# Altium PCB Lab1_Kondrashova_USB_RS485.PcbDoc
Units mm, origin at the board's own origin, x right, y up, seen from the top; angles counter-clockwise.
Board outline 39.5 x 22 mm, 4 copper layers (Top Layer, Signal Layer 1, Signal Layer 2, Bottom Layer), stack 1.522 mm thick; 23 components, 22 nets, 103 pads, 122 vias.
Unrouted connection lines stored in the file: 1.
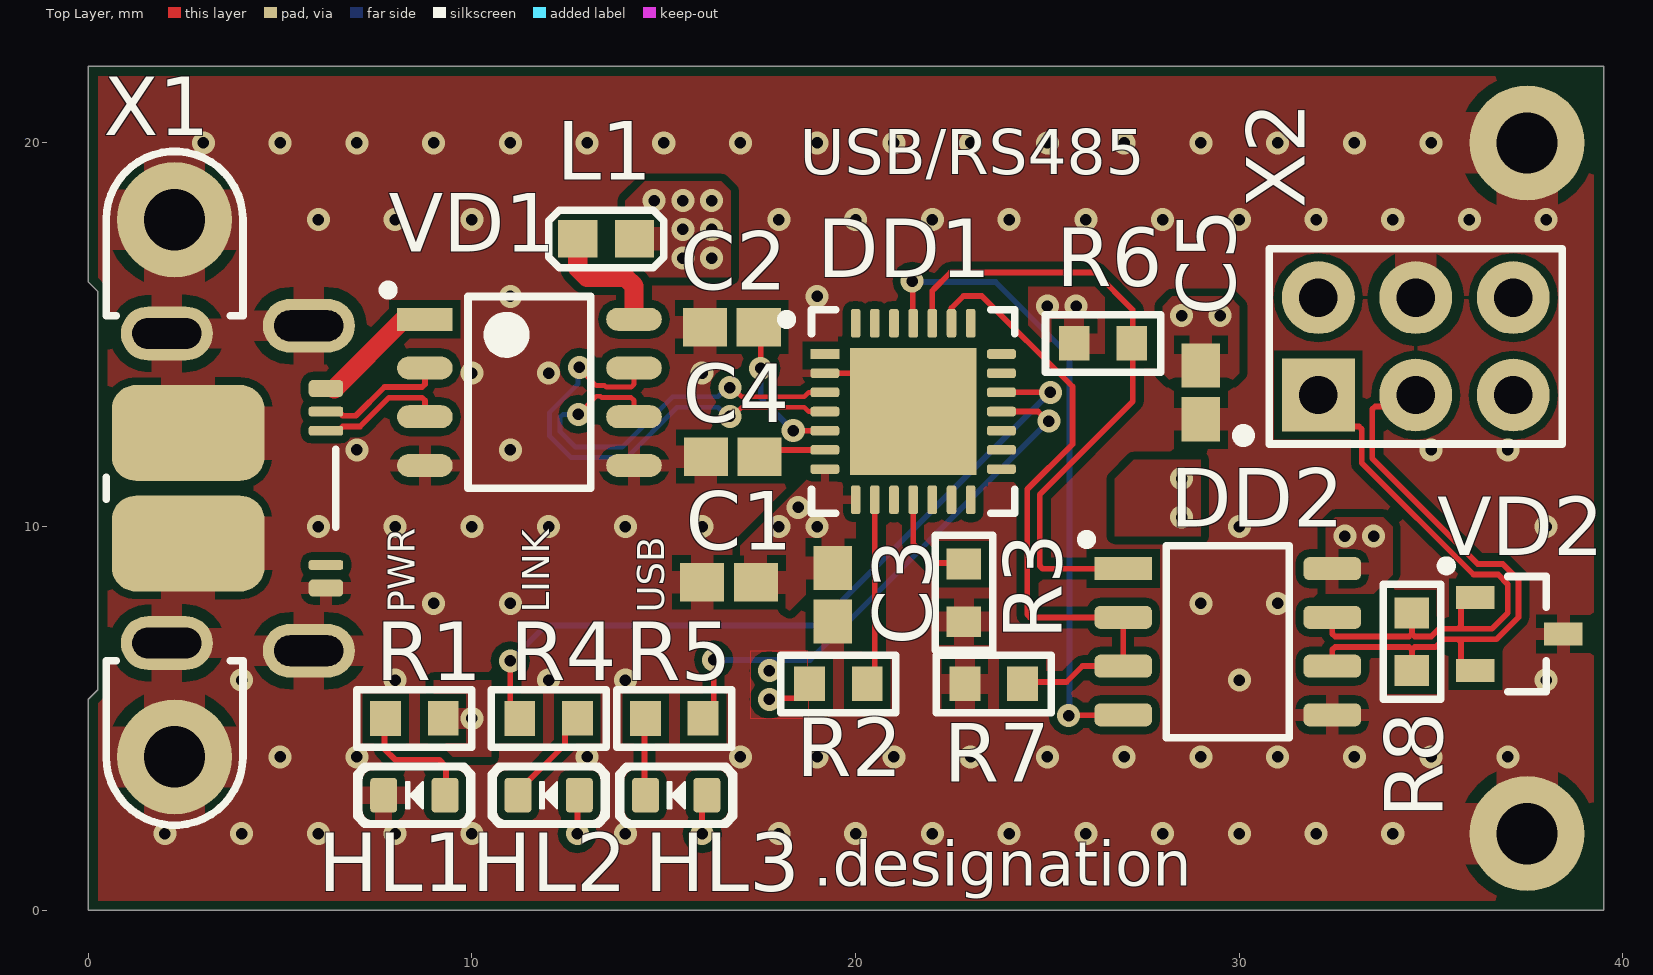
[diagram p0: Top Layer view]
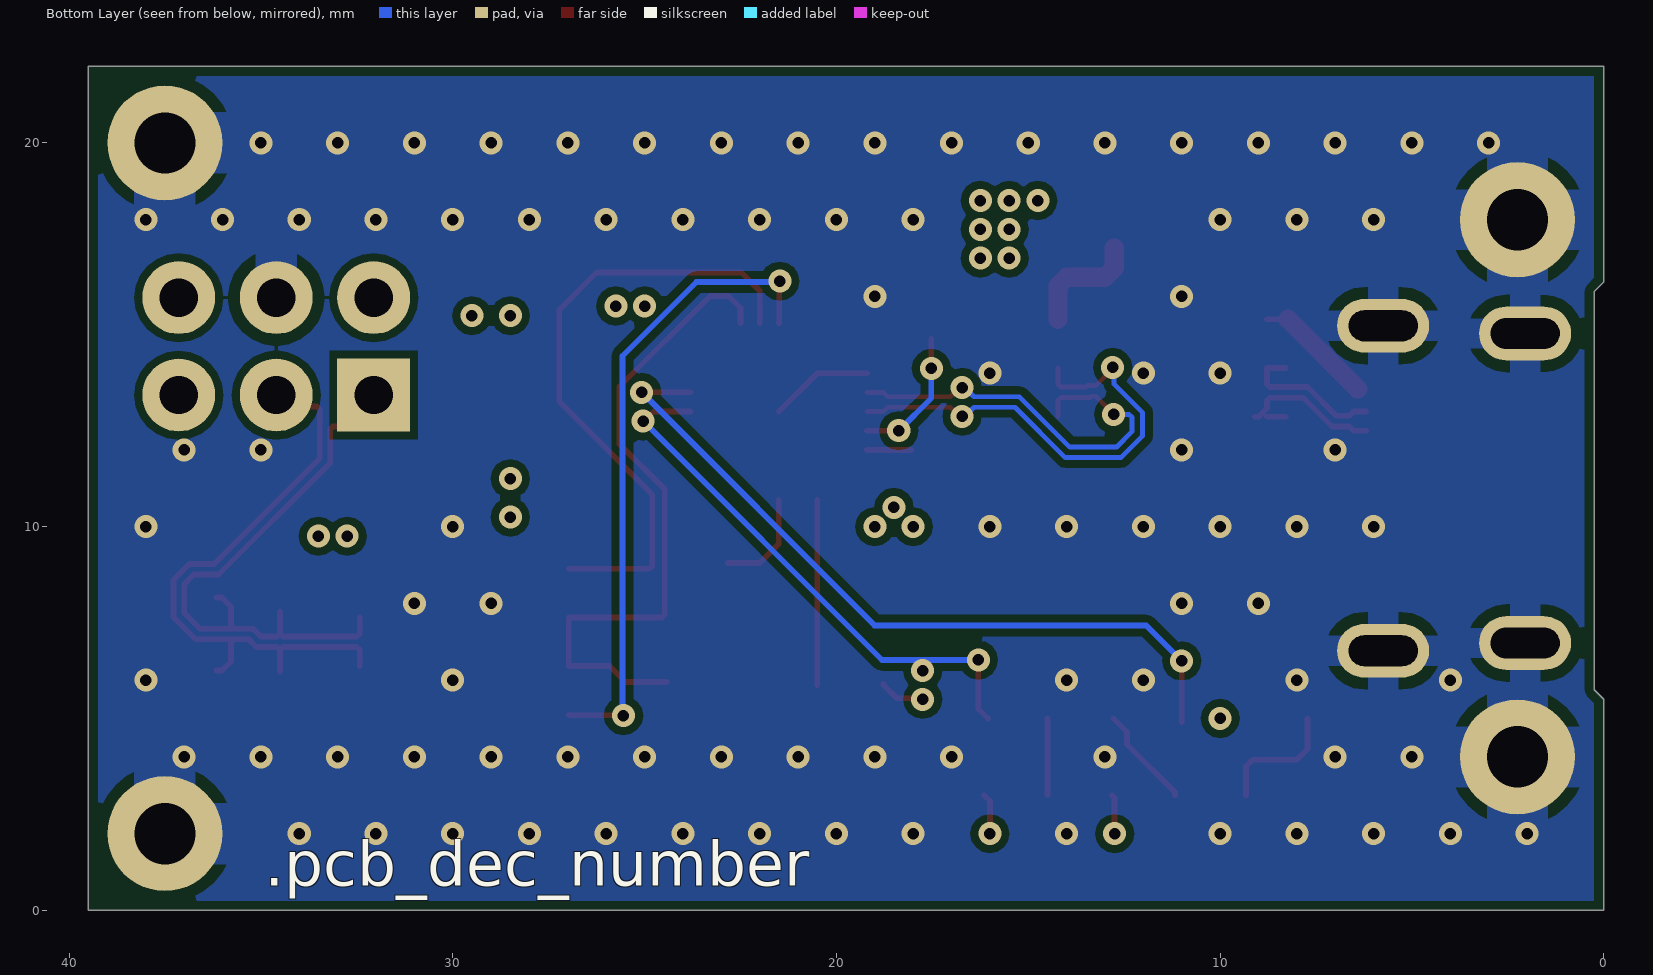
[diagram p1: Bottom Layer view, seen from below]
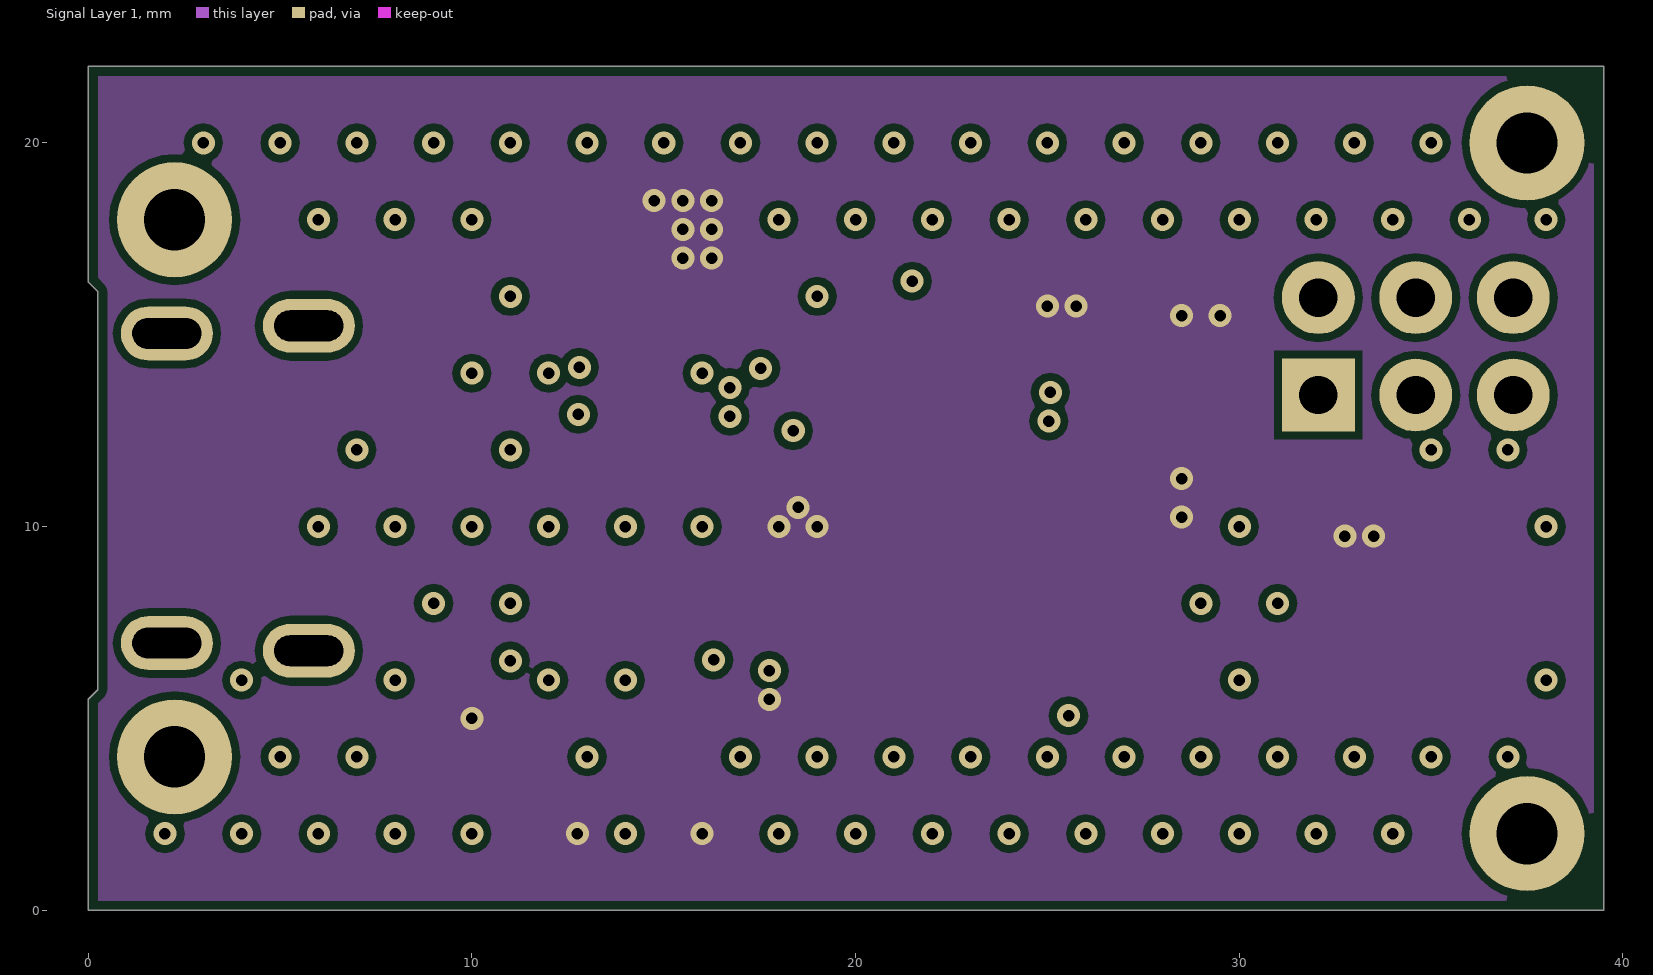
[diagram p2: Signal Layer 1]
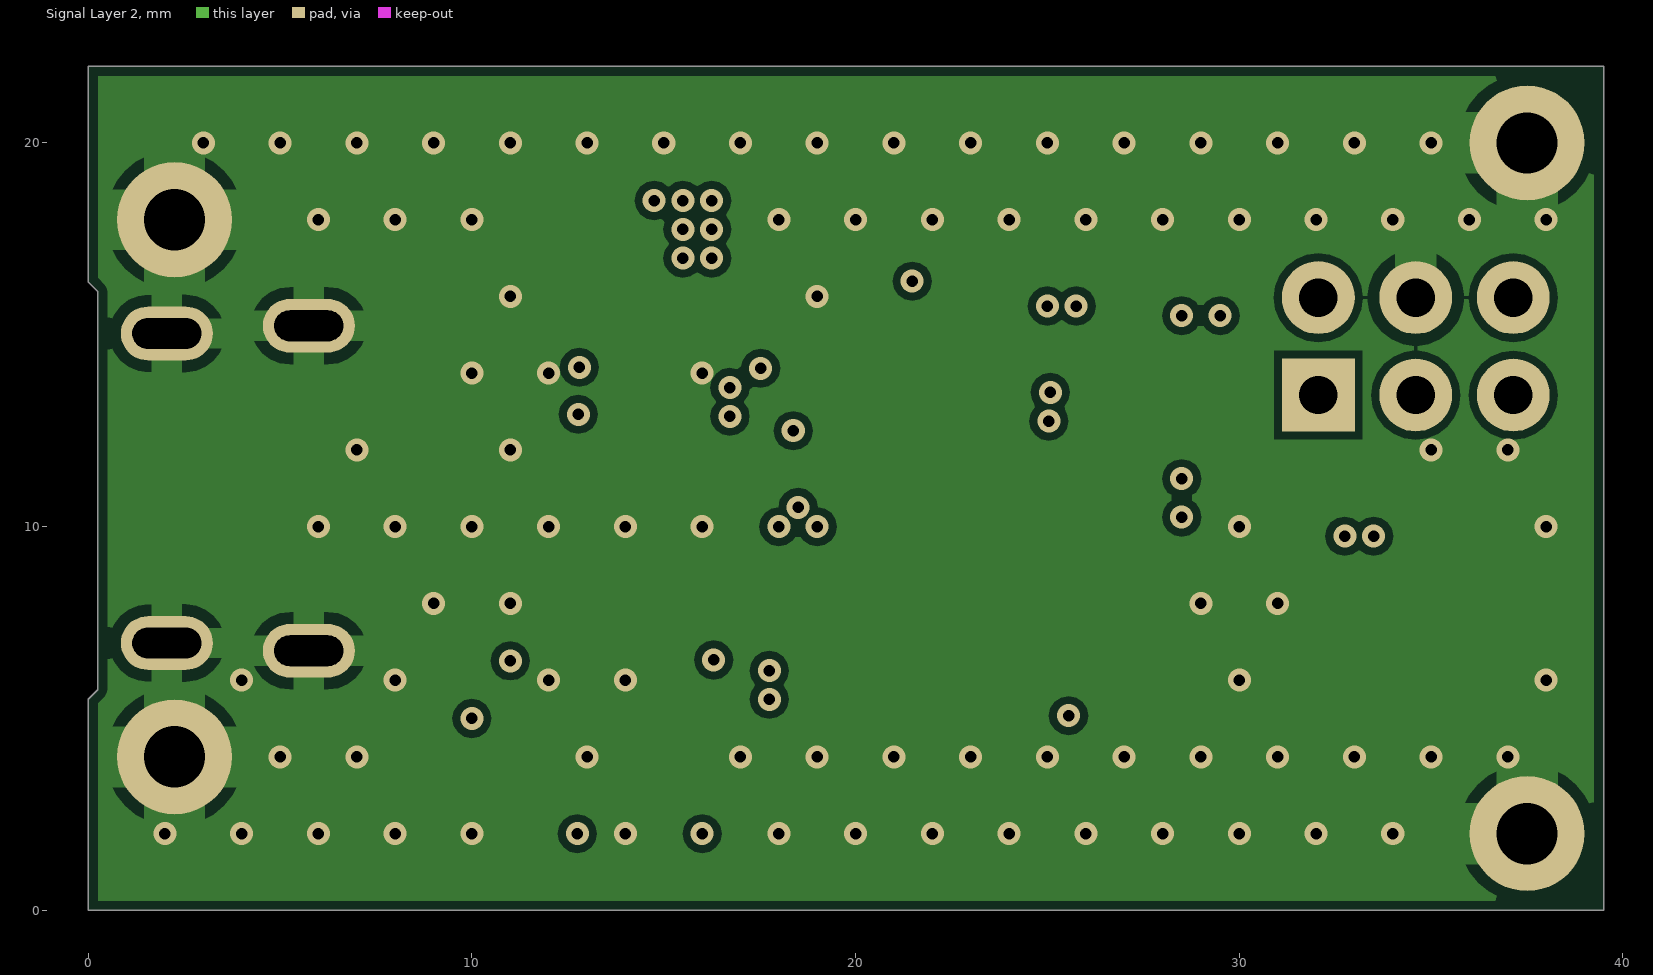
[diagram p3: Signal Layer 2]

## Layer stack, top to bottom
Top Solder: solder mask 0.0102, Solder Resist, Dk 3.5
Top Layer: signal copper 0.018
Prepreg 1: prepreg 0.125, FR4 HiTg170, Dk 5.07
Signal Layer 1: signal copper 0.018
Core 1: core 1.2, FR4, Dk 4.6
Signal Layer 2: signal copper 0.018
Prepreg 2: prepreg 0.125, FR4 HiTg170, Dk 5.07
Bottom Layer: signal copper 0.018
Bottom Solder: solder mask 0.0102, Solder Resist, Dk 3.5

## Board outline
0,0 0,5.5 0.25,5.75 0.25,16.125 0,16.375 0,22 39.5,22 39.5,0

## Design rules (kind name [scope] priority, off if disabled: settings)
AcuteAngle min_acute_angle [OnCopper] p1: minimum=3.50000000000000E+0001 checktracksonly=FALSE // Минимальный угол между примитивами топологии
BoardOutlineClearance board_outline_clearance_std [NOT (OnLayer('Bottom Overlay') OR OnLayer('Top Overlay'))] p1: gap=0.25 ignorepadtopadclearanceinfootprint=FALSE except(0: Arc-SplitContinuation Track-SplitContinuation SMDPad-SplitContinuation THPad-SplitContinuation Via-SplitContinuation Fill-SplitContinuation Poly-SplitContinuation Region-SplitContinuation Text-SplitContinuation) // Отступ элементов топологии от края фрезеруемой печатной платы
Clearance clearance_outer_18um_std [OnTopLayer OR OnBottomLayer] p1: gap=0.125 ignorepadtopadclearanceinfootprint=TRUE except(0.2: Arc-Fill Arc-Poly Track-Fill Track-Poly SMDPad-SMDPad SMDPad-Fill SMDPad-Poly THPad-Fill THPad-Poly Via-Fill Via-Poly Fill-Fill Fill-Poly Poly-Poly Poly-Region Poly-Text; 0.25: Arc-Hole Track-Hole SMDPad-Hole THPad-Hole Via-Hole Fill-Hole Poly-Hole Region-Hole Text-Hole) // Зазоры на внешних слоях
Clearance clearance_inner_18um_std [NOT (OnTopLayer Or OnBottomLayer)] p2: gap=0.125 ignorepadtopadclearanceinfootprint=FALSE except(0.2: Arc-Fill Arc-Poly Track-Fill Track-Poly SMDPad-SMDPad SMDPad-Fill SMDPad-Poly THPad-Fill THPad-Poly Via-Fill Via-Poly Fill-Fill Fill-Poly Poly-Poly Poly-Region Poly-Text; 0.25: Arc-Hole Track-Hole SMDPad-Hole THPad-Hole Via-Hole Fill-Hole Poly-Hole Region-Hole Text-Hole) // Зазоры на внутренних слоях
ComponentClearance [All] p1: gap=0 collisioncheckmode=3 verticalgap=0 showdistances=FALSE
DiffPairsRouting "Schematic Differential Pairs Routing_9" [InNet('CN_D_P')] p1: maxlimit=0.15 minlimit=0.15 mostfreqgap=0.15 toplayer_minwidth=0.125 toplayer_maxwidth=0.125 toplayer_prefwidth=0.125 midlayer1_minwidth=0.381 midlayer1_maxwidth=0.381 midlayer1_prefwidth=0.381 midlayer2_minwidth=0.381 midlayer2_maxwidth=0.381 midlayer2_prefwidth=0.381 bottomlayer_minwidth=0.125 bottomlayer_maxwidth=0.125 bottomlayer_prefwidth=0.125 maxuncoupledlength=12.7
DiffPairsRouting "Schematic Differential Pairs Routing_8" [InNet('RS485_N')] p2: maxlimit=0.15 minlimit=0.15 mostfreqgap=0.15 toplayer_minwidth=0.125 toplayer_maxwidth=0.125 toplayer_prefwidth=0.125 midlayer1_minwidth=0.381 midlayer1_maxwidth=0.381 midlayer1_prefwidth=0.381 midlayer2_minwidth=0.381 midlayer2_maxwidth=0.381 midlayer2_prefwidth=0.381 bottomlayer_minwidth=0.125 bottomlayer_maxwidth=0.125 bottomlayer_prefwidth=0.125 maxuncoupledlength=12.7
DiffPairsRouting "Schematic Differential Pairs Routing_7" [InNet('USB_D_N')] p3: maxlimit=0.15 minlimit=0.15 mostfreqgap=0.15 toplayer_minwidth=0.125 toplayer_maxwidth=0.125 toplayer_prefwidth=0.125 midlayer1_minwidth=0.381 midlayer1_maxwidth=0.381 midlayer1_prefwidth=0.381 midlayer2_minwidth=0.381 midlayer2_maxwidth=0.381 midlayer2_prefwidth=0.381 bottomlayer_minwidth=0.125 bottomlayer_maxwidth=0.125 bottomlayer_prefwidth=0.125 maxuncoupledlength=12.7
DiffPairsRouting "Schematic Differential Pairs Routing_6" [InNet('USB_D_P')] p4: maxlimit=0.15 minlimit=0.15 mostfreqgap=0.15 toplayer_minwidth=0.125 toplayer_maxwidth=0.125 toplayer_prefwidth=0.125 midlayer1_minwidth=0.381 midlayer1_maxwidth=0.381 midlayer1_prefwidth=0.381 midlayer2_minwidth=0.381 midlayer2_maxwidth=0.381 midlayer2_prefwidth=0.381 bottomlayer_minwidth=0.125 bottomlayer_maxwidth=0.125 bottomlayer_prefwidth=0.125 maxuncoupledlength=12.7
DiffPairsRouting "Schematic Differential Pairs Routing_5" [InNet('CN_D_N')] p5: maxlimit=0.65 minlimit=0.254 mostfreqgap=0.65 toplayer_mingap=0.65 toplayer_minwidth=0.125 toplayer_maxwidth=0.125 toplayer_prefwidth=0.125 bottomlayer_mingap=0.65 bottomlayer_minwidth=0.125 bottomlayer_maxwidth=0.125 bottomlayer_prefwidth=0.125 impedanceprofiledriven=TRUE impedanceprofileid={A63519B1-61F6-4221-AEF2-28902BD0E68D} impedanceprofilevalue=120.000000 maxuncoupledlength=12.7
DiffPairsRouting "Schematic Differential Pairs Routing_4" [InNet('CN_D_P')] p6: maxlimit=0.65 minlimit=0.254 mostfreqgap=0.65 toplayer_mingap=0.65 toplayer_minwidth=0.125 toplayer_maxwidth=0.125 toplayer_prefwidth=0.125 bottomlayer_mingap=0.65 bottomlayer_minwidth=0.125 bottomlayer_maxwidth=0.125 bottomlayer_prefwidth=0.125 impedanceprofiledriven=TRUE impedanceprofileid={A63519B1-61F6-4221-AEF2-28902BD0E68D} impedanceprofilevalue=120.000000 maxuncoupledlength=12.7
DiffPairsRouting "Schematic Differential Pairs Routing_3" [InNet('RS485_N')] p7: maxlimit=0.65 minlimit=0.254 mostfreqgap=0.65 toplayer_mingap=0.65 toplayer_minwidth=0.125 toplayer_maxwidth=0.125 toplayer_prefwidth=0.125 bottomlayer_mingap=0.65 bottomlayer_minwidth=0.125 bottomlayer_maxwidth=0.125 bottomlayer_prefwidth=0.125 impedanceprofiledriven=TRUE impedanceprofileid={A63519B1-61F6-4221-AEF2-28902BD0E68D} impedanceprofilevalue=120.000000 maxuncoupledlength=12.7
DiffPairsRouting "Schematic Differential Pairs Routing_2" [InNet('RS485_P')] p8: maxlimit=0.65 minlimit=0.254 mostfreqgap=0.65 toplayer_mingap=0.65 toplayer_minwidth=0.125 toplayer_maxwidth=0.125 toplayer_prefwidth=0.125 bottomlayer_mingap=0.65 bottomlayer_minwidth=0.125 bottomlayer_maxwidth=0.125 bottomlayer_prefwidth=0.125 impedanceprofiledriven=TRUE impedanceprofileid={A63519B1-61F6-4221-AEF2-28902BD0E68D} impedanceprofilevalue=120.000000 maxuncoupledlength=12.7
DiffPairsRouting diff_pairs_routing [All] p9: maxlimit=0.254 minlimit=0.127 mostfreqgap=0.254 toplayer_maxgap=0.127 toplayer_prefgap=0.127 toplayer_minwidth=0.143 toplayer_maxwidth=0.143 toplayer_prefwidth=0.143 midlayer1_minwidth=0.381 midlayer1_maxwidth=0.381 midlayer1_prefwidth=0.381 midlayer2_minwidth=0.381 midlayer2_maxwidth=0.381 midlayer2_prefwidth=0.381 bottomlayer_maxgap=0.127 bottomlayer_prefgap=0.127 bottomlayer_minwidth=0.143 bottomlayer_maxwidth=0.143 bottomlayer_prefwidth=0.143 impedanceprofiledriven=TRUE impedanceprofileid={FD46899E-B5A2-4EF5-A302-5D2DB6A51F35} maxuncoupledlength=12.7 // Правила трассировки дифференциальных пар
HoleSize min_hole_size_std [IsPad] p1: absolutevalues=TRUE maxlimit=5.9 minlimit=0.6 maxpercent=80.000 minpercent=20.000 // Диаметр межслойного переходного отверстия
HoleSize min_hole_size_via_std [IsVia] p2: absolutevalues=TRUE maxlimit=5.9 minlimit=0.3 maxpercent=80.000 minpercent=20.000 // Минимальный диаметр монтажного отверстия
HoleToHoleClearance hole_to_hole_clearance_std [All] p1: gap=0.2 allowstackedmicrovias=FALSE // Минимальное расстояние между краями двух отверстий
MinimumAnnularRing min_via_ar_std [All] p1: minimumring=0.15 // Поясок площадки переходного отверстия (Annular ring VIA)
MinimumAnnularRing min_pad_ar_std [All] p2: minimumring=0.2 // Поясок монтажной контактной площадки (Annular ring PAD)
MinimumSolderMaskSliver min_solder_mask_bridge_std [All] p1: minsoldermaskwidth=0.15 // Мнимальная ширина масочного мостика
PlaneClearance plane_clearance_18um_std [All] p1: clearance=0.2 // Отступ полигона (для слоя plane) от элементов топологии
PlaneConnect [All] p1: planeconnectstyle=Relief reliefexpansion=0.5 reliefentries=4 reliefconductorwidth=0.2 reliefairgap=0.2
PolygonConnect poly_connect_to_pad<=0.3 [(AsMM(PadXSize_AllLayers)<=0.301) or (AsMM(PadYSize_AllLayers)<=0.301)] p1: thpad.connectstyle=Relief thpad.reliefconductorwidth=0.2 thpad.reliefentries=4 thpad.polygonreliefangle="90 Angle" thpad.airgapwidth=0.2 smdpad.connectstyle=Relief smdpad.reliefconductorwidth=0.2 smdpad.reliefentries=4 smdpad.polygonreliefangle="90 Angle" smdpad.airgapwidth=0.2 via.connectstyle=Direct via.reliefconductorwidth=0.254 via.reliefentries=4 via.polygonreliefangle="90 Angle" via.airgapwidth=0.254 // Правила подключения полигонов для падов от 0,3мм и меньше
PolygonConnect poly_connect_to_pad<=0.4 [(AsMM(PadXSize_AllLayers)<=0.401) or (AsMM(PadYSize_AllLayers)<=0.401)] p2: thpad.connectstyle=Relief thpad.reliefconductorwidth=0.26 thpad.reliefentries=4 thpad.polygonreliefangle="90 Angle" thpad.airgapwidth=0.2 smdpad.connectstyle=Relief smdpad.reliefconductorwidth=0.26 smdpad.reliefentries=4 smdpad.polygonreliefangle="90 Angle" smdpad.airgapwidth=0.2 via.connectstyle=Direct via.reliefconductorwidth=0.254 via.reliefentries=4 via.polygonreliefangle="90 Angle" via.airgapwidth=0.254 // Правила подключения полигонов для падов от 0,4 и меньше
PolygonConnect poly_connect_to_pad<=0.6 [(AsMM(PadXSize_AllLayers)<=0.601) or (AsMM(PadYSize_AllLayers)<=0.601)] p3: thpad.connectstyle=Relief thpad.reliefconductorwidth=0.33 thpad.reliefentries=4 thpad.polygonreliefangle="90 Angle" thpad.airgapwidth=0.2 smdpad.connectstyle=Relief smdpad.reliefconductorwidth=0.33 smdpad.reliefentries=4 smdpad.polygonreliefangle="90 Angle" smdpad.airgapwidth=0.2 via.connectstyle=Direct via.reliefconductorwidth=0.254 via.reliefentries=4 via.polygonreliefangle="90 Angle" via.airgapwidth=0.254 // Правила подключения полигонов для падов от 0,6мм и меньше
PolygonConnect poly_connect_to_pad<=0.7 [(AsMM(PadXSize_AllLayers)<=0.701) or (AsMM(PadYSize_AllLayers)<=0.701)] p4: thpad.connectstyle=Relief thpad.reliefconductorwidth=0.46 thpad.reliefentries=4 thpad.polygonreliefangle="90 Angle" thpad.airgapwidth=0.2 smdpad.connectstyle=Relief smdpad.reliefconductorwidth=0.46 smdpad.reliefentries=4 smdpad.polygonreliefangle="90 Angle" smdpad.airgapwidth=0.2 via.connectstyle=Direct via.reliefconductorwidth=0.254 via.reliefentries=4 via.polygonreliefangle="90 Angle" via.airgapwidth=0.254 // Правила подключения полигонов для падов от 0,7мм и меньше
PolygonConnect poly_connect_to_pad<=0.8 [(AsMM(PadXSize_AllLayers)<=0.8)or(AsMM(PadYSize_AllLayers)<=0.8)] p5: thpad.connectstyle=Relief thpad.reliefconductorwidth=0.53 thpad.reliefentries=4 thpad.polygonreliefangle="90 Angle" thpad.airgapwidth=0.3 smdpad.connectstyle=Relief smdpad.reliefconductorwidth=0.53 smdpad.reliefentries=4 smdpad.polygonreliefangle="90 Angle" smdpad.airgapwidth=0.2 via.connectstyle=Direct via.reliefconductorwidth=0.254 via.reliefentries=4 via.polygonreliefangle="90 Angle" via.airgapwidth=0.254 // Правила подключения полигонов для падов от 0,8мм и меньше
PolygonConnect poly_connect_to_pad<=1 [(AsMM(PadXSize_AllLayers)<=1.01)or(AsMM(PadYSize_AllLayers)<=1.01)] p6: thpad.connectstyle=Relief thpad.reliefconductorwidth=0.6 thpad.reliefentries=4 thpad.polygonreliefangle="90 Angle" thpad.airgapwidth=0.3 smdpad.connectstyle=Relief smdpad.reliefconductorwidth=0.6 smdpad.reliefentries=4 smdpad.polygonreliefangle="90 Angle" smdpad.airgapwidth=0.2 via.connectstyle=Direct via.reliefconductorwidth=0.254 via.reliefentries=4 via.polygonreliefangle="90 Angle" via.airgapwidth=0.254 // Правила подключения полигонов для падов от 1мм и меньше
PolygonConnect poly_connect_to_pad<=1.3 [(AsMM(PadXSize_AllLayers)<=1.31)or(AsMM(PadYSize_AllLayers)<=1.31)] p7: thpad.connectstyle=Relief thpad.reliefconductorwidth=0.66 thpad.reliefentries=4 thpad.polygonreliefangle="90 Angle" thpad.airgapwidth=0.3 smdpad.connectstyle=Relief smdpad.reliefconductorwidth=0.86 smdpad.reliefentries=4 smdpad.polygonreliefangle="90 Angle" smdpad.airgapwidth=0.2 via.connectstyle=Direct via.reliefconductorwidth=0.254 via.reliefentries=4 via.polygonreliefangle="90 Angle" via.airgapwidth=0.254 // Правила подключения полигонов для падов от 1,3мм и меньше
PolygonConnect poly_connect_to_pad<=1.6 [(AsMM(PadXSize_AllLayers)<=1.61)or(AsMM(PadYSize_AllLayers)<=1.61)] p8: thpad.connectstyle=Relief thpad.reliefconductorwidth=0.8 thpad.reliefentries=4 thpad.polygonreliefangle="90 Angle" thpad.airgapwidth=0.3 smdpad.connectstyle=Relief smdpad.reliefconductorwidth=1 smdpad.reliefentries=4 smdpad.polygonreliefangle="90 Angle" smdpad.airgapwidth=0.2 via.connectstyle=Direct via.reliefconductorwidth=0.254 via.reliefentries=4 via.polygonreliefangle="90 Angle" via.airgapwidth=0.254 // Правила подключения полигонов для падов от 1,6мм и меньше
PolygonConnect poly_connect_to_pad<=1.8 [(AsMM(PadXSize_AllLayers)<=1.8)or(AsMM(PadYSize_AllLayers)<=1.8)] p9: thpad.connectstyle=Relief thpad.reliefconductorwidth=1 thpad.reliefentries=4 thpad.polygonreliefangle="90 Angle" thpad.airgapwidth=0.3 smdpad.connectstyle=Relief smdpad.reliefconductorwidth=1.2 smdpad.reliefentries=4 smdpad.polygonreliefangle="90 Angle" smdpad.airgapwidth=0.2 via.connectstyle=Direct via.reliefconductorwidth=0.254 via.reliefentries=4 via.polygonreliefangle="90 Angle" via.airgapwidth=0.254 // Правила подключения полигонов для падов от 1,8мм и меньше
PolygonConnect poly_connect_to_pad<=2 [(AsMM(PadXSize_AllLayers)<=2.01)or(AsMM(PadYSize_AllLayers)<=2.01)] p10: thpad.connectstyle=Relief thpad.reliefconductorwidth=1.1 thpad.reliefentries=4 thpad.polygonreliefangle="90 Angle" thpad.airgapwidth=0.3 smdpad.connectstyle=Relief smdpad.reliefconductorwidth=1.4 smdpad.reliefentries=4 smdpad.polygonreliefangle="90 Angle" smdpad.airgapwidth=0.2 via.connectstyle=Direct via.reliefconductorwidth=0.254 via.reliefentries=4 via.polygonreliefangle="90 Angle" via.airgapwidth=0.254 // Правила подключения полигонов для падов от 2мм и меньше
PolygonConnect poly_connect_to_pad<=2.3 [(AsMM(PadXSize_AllLayers)<=2.31)or(AsMM(PadYSize_AllLayers)<=2.31)] p11: thpad.connectstyle=Relief thpad.reliefconductorwidth=1.2 thpad.reliefentries=4 thpad.polygonreliefangle="90 Angle" thpad.airgapwidth=0.3 smdpad.connectstyle=Relief smdpad.reliefconductorwidth=1.4 smdpad.reliefentries=4 smdpad.polygonreliefangle="90 Angle" smdpad.airgapwidth=0.2 via.connectstyle=Direct via.reliefconductorwidth=0.254 via.reliefentries=4 via.polygonreliefangle="90 Angle" via.airgapwidth=0.254 // Правила подключения полигонов для падов от 2,3мм и меньше
PolygonConnect poly_connect_to_pad<=2.5 [(AsMM(PadXSize_AllLayers)<=2.51)or(AsMM(PadYSize_AllLayers)<=2.51)] p12: thpad.connectstyle=Relief thpad.reliefconductorwidth=1.2 thpad.reliefentries=4 thpad.polygonreliefangle="90 Angle" thpad.airgapwidth=0.3 smdpad.connectstyle=Relief smdpad.reliefconductorwidth=1.4 smdpad.reliefentries=4 smdpad.polygonreliefangle="90 Angle" smdpad.airgapwidth=0.2 via.connectstyle=Direct via.reliefconductorwidth=0.254 via.reliefentries=4 via.polygonreliefangle="90 Angle" via.airgapwidth=0.254 // Правила подключения полигонов для падов от 2,5мм и меньше
PolygonConnect poly_connect_to_pad<=2.7 [(AsMM(PadXSize_AllLayers)<=2.71)or(AsMM(PadYSize_AllLayers)<=2.71)] p13: thpad.connectstyle=Relief thpad.reliefconductorwidth=1.4 thpad.reliefentries=4 thpad.polygonreliefangle="90 Angle" thpad.airgapwidth=0.3 smdpad.connectstyle=Relief smdpad.reliefconductorwidth=1.6 smdpad.reliefentries=4 smdpad.polygonreliefangle="90 Angle" smdpad.airgapwidth=0.2 via.connectstyle=Direct via.reliefconductorwidth=0.254 via.reliefentries=4 via.polygonreliefangle="90 Angle" via.airgapwidth=0.254 // Правила подключения полигонов для падов от 2,7мм и меньше
PolygonConnect poly_connect_to_pad<=3 [(AsMM(PadXSize_AllLayers)<=3.01)or(AsMM(PadYSize_AllLayers)<=3.01)] p14: thpad.connectstyle=Relief thpad.reliefconductorwidth=1.6 thpad.reliefentries=4 thpad.polygonreliefangle="90 Angle" thpad.airgapwidth=0.3 smdpad.connectstyle=Relief smdpad.reliefconductorwidth=1.8 smdpad.reliefentries=4 smdpad.polygonreliefangle="90 Angle" smdpad.airgapwidth=0.2 via.connectstyle=Direct via.reliefconductorwidth=0.254 via.reliefentries=4 via.polygonreliefangle="90 Angle" via.airgapwidth=0.254 // Правила подключения полигонов для падов от 3мм и меньше
PolygonConnect poly_connect_to_pad<=7 [(AsMM(PadXSize_AllLayers)<7.01)or(AsMM(PadYSize_AllLayers)<=7.01)] p15: thpad.connectstyle=Relief thpad.reliefconductorwidth=2 thpad.reliefentries=4 thpad.polygonreliefangle="90 Angle" thpad.airgapwidth=0.4 smdpad.connectstyle=Relief smdpad.reliefconductorwidth=2 smdpad.reliefentries=4 smdpad.polygonreliefangle="90 Angle" smdpad.airgapwidth=0.3 via.connectstyle=Direct via.reliefconductorwidth=0.254 via.reliefentries=4 via.polygonreliefangle="90 Angle" via.airgapwidth=0.254 // Правила подключения полигонов для падов от 7мм и меньше
PolygonConnect poly_connect_to_pad [All] p16: thpad.connectstyle=Relief thpad.reliefconductorwidth=0.25 thpad.reliefentries=4 thpad.polygonreliefangle="90 Angle" thpad.airgapwidth=0.2 smdpad.connectstyle=Relief smdpad.reliefconductorwidth=0.25 smdpad.reliefentries=4 smdpad.polygonreliefangle="90 Angle" smdpad.airgapwidth=0.2 via.connectstyle=Direct via.reliefconductorwidth=0.25 via.reliefentries=4 via.polygonreliefangle="90 Angle" via.airgapwidth=0.2 // Правила подключения полигонов общие
RoutingCorners [All] p1 off: cornerstyle=45-Degree minsetback=2.5 maxsetback=2.5
RoutingVias [All] p1: holewidth=0.3 width=0.6 viastyle="Through Hole" minholewidth=0.3 minwidth=0.6 maxholewidth=5.9 maxwidth=6.4
SilkToSilkClearance silk_to_silk_clearance_std [All] p1 off: silktosilkclearance=0.15 // Отступ текста шелкографии от других примитивов шелкографии
SilkToSolderMaskClearance silk_to_solder_mask_clearance_std [IsPad] p1 off: minsilkscreentomaskgap=0.15 clearancetoexposedcopper=FALSE // Минимальное расстояние между элементами шелкографии и вскрытой медью
SolderMaskExpansion solder_mask_expansion_std [All] p1: expansion=0.05 // Припуск паяльной масски
UnRoutedNet [All] p1: checkbadconnections=TRUE
Width width_18um_std [All] p1: maxlimit=10 minlimit=0.125 preferedwidth=0.15 checkconnectedcopper=TRUE // Ширина проводников (общая)
19 further rules are at their usual default settings.

## Classes and differential pairs
differential pair class USB_SIGNALS: CN_D RS485 USB_D
differential pair USB_D: +USB_D_P -USB_D_N
differential pair RS485: +RS485_P -RS485_N
differential pair CN_D: +CN_D_P -CN_D_N

## Components (designator, comment, footprint, x,y, rotation, side; value= is the part's Value field where it differs from the comment)
C1 "1 мк" C0603 16.7,8.55 r180 top
C2 "1 мк" C0603 16.775,15.2 r180 top
C3 "0,1 мк" C0603 19.4,8.225 r270 top
C4 "0,1 мк" C0603 16.8,11.825 r180 top
C5 "0,1 мк" C0603 29,13.5 r90 top
DD1 "CP2103-GM" QFN-28-500X500X90 21.5,13 r0 top
DD2 "SN65HVD1782D" SOIC-8 29.7,7 r0 top
HL1 "TLMY1000-GS08" HL0603 8.5,3 r0 top
HL2 "TLMS1000-GS08" HL0603 12,3 r0 top
HL3 "TLMG1100-GS08" HL0603 15.325,3 r0 top
L1 "BLM18PG221SN1D" BLM-2-0603 13.5,17.5 r0 top
R1 "220" R0603 8.5,5 r0 top
R2 "4,7 к" R0603 19.55,5.9 r180 top
R3 "10 к" R0603 22.825,8.275 r90 top
R4 "330" R0603 12,5 r0 top
R5 "330" R0603 15.275,5 r0 top
R6 "10 к" R0603 26.45,14.775 r180 top (schematic designator R7)
R7 "10 к" R0603 23.6,5.9 r0 top (schematic designator R6)
R8 "120" R0603 34.5,7 r90 top
VD1 "USB6B1" SO-8 11.5,13.5 r0 top
VD2 "SM712-02HTG" SOT23-3 37.3,7.2 r0 top
X1 "2108877-1" 2108877-1 2.5,11 r90 top
X2 "DS1021-2x3SF11-B" DS1021-2X3SF11-B 34.6,14.7 r0 top

## Footprints (in the part's own frame and the unit in brackets; to place one, negate y for a bottom-side part, rotate by r counter-clockwise, add the part's x,y. Pads: shape width x height; smd on the part's side, far side on the other; paste and mask are expansions set on the pad)
2108877-1 [mm]
  rrect50% 0.45x0.9 smd: 1(2.6,-3.696) 5(-2.6,-3.696)
  rrect50% 0.25x0.9 smd: 2(2,-3.696) 3(1.5,-3.696) 4(-2,-3.696)
  round 3 hole 1.6: TP1(-7,0.25) TP1(7,0.25)
  oval 1.4x2.4 hole 0.8 slot 1.8 at 90 deg mask+0.102: TP1(-4.235,-3.25) TP1(-4.035,0.45) TP1(4.035,0.45) TP1(4.235,-3.25)
  rrect50% 2.5x3.98 smd: TP1(-1.441,-0.104) TP1(1.441,-0.104)
  silkscreen extent -8.78,-3.95 8.78,2.03, body extent -8.9,-3.95 8.9,3.95, height 3.39
BLM-2-0603 [mm] "Chip Inductor, 2-Leads, Body 1,60x0,80mm, IPC Medium Density"
  rect 1.02x0.98 smd: 1(-0.74,0) 2(0.74,0)
  silkscreen extent -1.5,-0.75 1.5,0.75, body extent -0.8,-0.37 0.8,0.38, height 0.8
C0603 [mm] "Chip Capacitor, 2-Leads, Body 1,60x0,80mm, IPC Medium Density"
  rect 1.15x1 smd: 1(-0.7,0) 2(0.7,0)
  body extent -0.8,-0.4 0.8,0.4, height 0.8
DS1021-2X3SF11-B [mm]
  rect 1.9x1.9 hole 1: 1(-2.54,-1.27)
  round 1.9 hole 1: 2(0,-1.27) 4(-2.54,1.27)
  round 1.9 hole 1 mask+0.102: 3(2.54,-1.27) 5(0,1.27) 6(2.54,1.27)
  silkscreen extent -4.5,-2.55 3.81,2.54, body extent -3.81,-2.54 3.81,2.54, height 8.59
HL0603 [mm] "Chip Resistor, 2-Leads, Body 1,60x0,80mm, IPC Medium Density"
  rrect25% 0.7x0.9 smd: 1(-0.8,0) 2(0.8,0)
  silkscreen extent -1.5,-0.75 1.5,0.75, body extent -0.81,-0.4 0.81,0.4, height 0.64
QFN-28-500X500X90 [mm] "QFN, 28-Leads, Body 5,00x5,00mm, Pitch 0,50mm, Thermal Pad 3,20x3,20mm, IPC Medium Density"
  rect 3.3x3.3 smd: 0(0,0)
  rect 0.75x0.25 smd: 1(-2.3,1.5)
  rrect50% 0.75x0.25 smd: 2(-2.3,1) 3(-2.3,0.5) 4(-2.3,0) 5(-2.3,-0.5) 6(-2.3,-1) 7(-2.3,-1.5) 15(2.3,-1.5) 16(2.3,-1) 17(2.3,-0.5) 18(2.3,0) 19(2.3,0.5) 20(2.3,1) 21(2.3,1.5)
  rrect50% 0.25x0.75 smd: 8(-1.5,-2.3) 9(-1,-2.3) 10(-0.5,-2.3) 11(0,-2.3) 12(0.5,-2.3) 13(1,-2.3) 14(1.5,-2.3) 22(1.5,2.3) 23(1,2.3) 24(0.5,2.3) 25(0,2.3) 26(-0.5,2.3) 27(-1,2.3) 28(-1.5,2.3)
  silkscreen extent -3.42,-2.65 2.65,2.65, body extent -2.5,-2.5 2.5,2.5, height 0.9
R0603 [mm] "Chip Resistor, 2-Leads, Body 1,60x0,80mm, IPC Medium Density"
  rect 0.8x0.9 smd: 1(-0.75,0) 2(0.75,0)
  silkscreen extent -1.5,-0.75 1.5,0.75, body extent -0.77,-0.43 0.78,0.43, height 0.43
SO-8 [mm] "SOIC, 8-Leads, Body 4,90x3,90mm, Pitch 1,27mm, IPC Medium Density"
  rect 1.45x0.6 smd: 1(-2.725,1.905)
  oval 1.45x0.6 smd: 2(-2.725,0.635) 3(-2.725,-0.635) 4(-2.725,-1.905) 5(2.725,-1.905) 6(2.725,-0.635) 7(2.725,0.635) 8(2.725,1.905)
  silkscreen extent -3.81,-2.5 1.6,2.79, body extent -3.06,-2.47 3.06,2.48, height 1.75
SOIC-8 [mm] "SOIC, 8-Leads, Body 4,90x3,90mm, Pitch 1,27mm, IPC Medium Density"
  rect 1.5x0.6 smd: 1(-2.725,1.905)
  rrect50% 1.5x0.6 smd: 2(-2.725,0.635) 3(-2.725,-0.635) 4(-2.725,-1.905) 5(2.725,-1.905) 6(2.725,-0.635) 7(2.725,0.635) 8(2.725,1.905)
  silkscreen extent -3.81,-2.5 1.6,2.79, body extent -3.06,-2.47 3.06,2.48, height 1.75
SOT23-3 [mm] "SOT23, 3-Leads, Body 2,92x2,37mm"
  rect 1x0.6 smd: 1(-1.145,0.95) 2(-1.145,-0.95) 3(1.145,0)
  silkscreen extent -2.03,-1.5 0.7,1.9, body extent -1.25,-1.5 1.25,1.5, height 1.1

## Part data
C1 C2: library part c0008, "=Описание", HelpURL=https://www.yageo.com/upload/media/product/products/datasheet/mlcc/UPY-GPHC_X7R_6.3V-to-50V_20.pdf, ID=c0008, Корпус=0603, Наименование=CC0603KRX7R8BB105, Напряжение="25 В", Номинал="1 мк", Номинальное напряжение="25 В", Описание="Конденсатор чип 0603 1 мкФ 25 В ±10 %", Отклонение="±10 %", Производитель=Yageo, Рабочие температуры="от -55 °С до +125 °С", Фамилия=Ларионов
C3 C4 C5: library part c0005, "=Описание", HelpURL=https://www.yageo.com/upload/media/product/products/datasheet/mlcc/UPY-GPHC_X7R_6.3V-to-50V_20.pdf, ID=c0005, Корпус=0603, Наименование=CC0603JRX7R9BB104, Напряжение="50 В", Номинал="0,1 мк", Номинальное напряжение="50 В", Описание="Конденсатор чип 0603 0,1 мкФ 50 В ±5 %", Отклонение="±5 %", Производитель=Yageo, Рабочие температуры="от -55 °С до +125 °С", Фамилия=Ларионов
DD1: library part dd0003, "=Описание", HelpURL=https://www.silabs.com/interface/usb-bridges/classic/device.cp2102, ID=dd0003, Корпус=QFN-28, Наименование=CP2103-GM, Описание="Преобразователь USB-UART", Производитель="Silicon Laboratories", Фамилия=Кондрашова
DD2: library part dd0014, "=Описание", HelpURL=https://www.ti.com/product/SN65HVD1782, ID=dd0014, Корпус=SOIC-8, Наименование=SN65HVD1782D, Описание="Приемопередатчик RS-485", Производитель="Texas Instruments", Фамилия=Кондрашова
HL1: library part hl0003, "=Описание", Colour=Желтый, HelpURL=https://www.vishay.com/leds/list/product-83172/, ID=hl0003, Корпус=0603, Наименование=TLMY1000-GS08, Номинальная длина волны="588 нм", Номинальная сила света="7,5 мкд", Номинальное падение напряжения="1,8 В", Номинальный прямой ток="15 мА", Описание="Светодиод чип 0603 желтый", Производитель="Vishay Intertechnology, Inc.", Рабочие температуры="от –40 °С до +100 °С", Рассеиваемая мощность="40 мВт", Фамилия=Ларионов, Цвет=Желтый
HL2: library part hl0001, "=Описание", Colour=Красный, HelpURL=https://www.vishay.com/leds/list/product-83172/, ID=hl0001, Корпус=0603, Наименование=TLMS1000-GS08, Номинальная длина волны="628 нм", Номинальная сила света="4 мкд", Номинальное падение напряжения="1,8 В", Номинальный прямой ток="15 мА", Описание="Светодиод чип 0603 красный", Производитель="Vishay Intertechnology, Inc.", Рабочие температуры="от –40 °С до +100 °С", Рассеиваемая мощность="40 мВт", Фамилия=Ларионов, Цвет=Красный
HL3: library part hl0005, "=Описание", Colour=Зеленый, HelpURL=https://www.vishay.com/leds/list/product-83173/, ID=hl0005, Корпус=0603, Наименование=TLMG1100-GS08, Номинальная длина волны="570 нм", Номинальная сила света="35 мкд", Номинальное падение напряжения="2,1 В", Номинальный прямой ток="30 мА", Описание="Светодиод чип 0603 зеленый", Производитель="Vishay Intertechnology, Inc.", Рабочие температуры="от –40 °С до +100 °С", Рассеиваемая мощность="90 мВт", Фамилия=Ларионов, Цвет=Зеленый
L1: library part l0002, "=Описание", HelpURL=https://www.murata.com/en-global/products/productdetail?partno=BLM18PG221SN1%23, ID=l0002, Корпус=0603, Наименование=BLM18PG221SN1D, Описание="Ферритовая бусина 220 Ом ±25 %", Отклонение, 100 Мгц="±25 %", Производитель="Murata Manufacturing Co., Ltd.", Рабочие температуры="от -55 °С до +125 °С", Сопротивление, 100 МГц="220 Ом", Сопротивление при постоянном токе="0,1 Ом", Фамилия=Самарин
R1: library part r0008, "=Описание", HelpURL=https://www.yageo.com/upload/media/product/productsearch/datasheet/rchip/PYu-RC_Group_51_RoHS_L_11.pdf, ID=r0008, Корпус=0603, Наименование=RC0603FR-07220RL, Номинал=220, Номинальное напряжение="75 В", Номинальный ток="1 А", Описание="Резистор чип 0603 220 Ом ±1 % 0,1 Вт", Отклонение="±1 %", Производитель=Yageo, Рабочие температуры="от -55 °С до +155 °С", Фамилия=Ларионов
R2 R3: library part r0005, "=Описание", HelpURL=https://www.yageo.com/upload/media/product/productsearch/datasheet/rchip/PYu-RC_Group_51_RoHS_L_11.pdf, ID=r0005, Корпус=0603, Наименование=RC0603FR-07330RL, Номинал=330, Номинальное напряжение="75 В", Номинальный ток="1 А", Описание="Резистор чип 0603 330 Ом ±1 % 0,1 Вт", Отклонение="±1 %", Производитель=Yageo, Рабочие температуры="от -55 °С до +155 °С", Фамилия=Ларионов
R4 R5 R6 R7: library part r0012, "=Описание", HelpURL=https://www.yageo.com/upload/media/product/productsearch/datasheet/rchip/PYu-RC_Group_51_RoHS_L_11.pdf, ID=r0012, Корпус=0603, Наименование=RC0603FR-0710KL, Номинал="10 к", Номинальное напряжение="75 В", Номинальный ток="1 А", Описание="Резистор чип 0603 10 кОм ±1 % 0,1 Вт", Отклонение="±1 %", Производитель=Yageo, Рабочие температуры="от -55 °С до +155 °С", Фамилия=Самарин
R8: library part r0007, "=Описание", HelpURL=https://www.yageo.com/upload/media/product/productsearch/datasheet/rchip/PYu-RC_Group_51_RoHS_L_11.pdf, ID=r0007, Корпус=0603, Наименование=RC0603FR??07120RL, Номинал=120, Номинальное напряжение="75 В", Номинальный ток="1 А", Описание="Резистор чип 0603 120 Ом ±1 % 0,1 Вт", Отклонение="±1 %", Производитель=Yageo, Рабочие температуры="от -55 °С до +155 °С", Фамилия=Самарин
VD1: library part vd0005, "=Описание", HelpURL=https://www.st.com/content/st_com/en/products/protection-devices/esd-protection/usb-port-protection/usb6b1.html, ID=vd0005, Корпус=SO-8, Наименование=USB6B1, Описание="Диодная сборка для подавления помех, от 6 В", Производитель=STMicroelectronics, Фамилия=Ларионов
VD2: library part vd0003, "=Описание", HelpURL=https://www.littelfuse.com/products/tvs-diode-arrays/general-purpose-esd-protection/sm712.aspx, ID=vd0003, Корпус=SOT23-3, Наименование=SM712-02HTG, Описание="Диодная сборка для подавления помех, -7/12 В", Производитель="Littelfuse, Inc.", Фамилия=Самарин
X1: library part x0001, "=Описание", Contact_1=VBUS, Contact_2=D-, Contact_3=D+, Contact_4=ID, Contact_5=GND, HelpURL=https://www.te.com/global-en/product-2108877-1.html, ID=x0001, Наименование=2108877-1, Описание="Micro USB Type B IP68 гнездо", Производитель="TE Connectivity", Фамилия=Ларионов
X2: library part x0015, "=Описание", Contact_1=B, Contact_2=A, Contact_3=GND, Contact_4=GND, Contact_5=GND, Contact_6=GND, HelpURL=http://en.connfly.group/product/xVkr=EusQssAN0gN=Aos=mU+UrVkR9kqEAN0gN9g+WqANB+A, ID=x0015, Наименование=DS1021-2x3SF11-B, Описание="PLS 2x3 pin 2,54 мм вилка прямой", Производитель="Connfly Electronic Co., Ltd.", Фамилия=Самарин

## Free pads (board coordinates)
  round 3 hole 1.6: 2(37.5,2) 2(37.5,20)

## Via types
v1: diameter 0.6/0.6/0.6/0.6 (per signal layer), hole 0.3, Top Layer to Bottom Layer, tented both sides, 121 vias
v2: diameter 0.6/0.6/0.6/0.6 (per signal layer), hole 0.3, Top Layer to Bottom Layer, 1 vias

## Nets (pads, with @x,y where several pads share a name; then routed paths per layer and width w, separated by ;. In a path a pad name is that pad's centre, name@x,y a point inside that pad or via, vN(x,y) a via of type N, cw(c..) or ccw(c..) an arc to the next point about the centre after c; other vN are vias at no path point)
+5V: C1.1 C3.1 C5.2 DD1.7 DD1.8 DD2.8 HL2.2 HL3.2 L1.2 R1.2 R2.2 R6.2 | length 3.3
  Top Layer w0.15: v1(12.75,2) 12.75,2.925 HL2.2@12.825,3 ; v1(16,2) 16,2.85 HL3.2@16.15,3 ; v1(17.75,5.5) 17.775,5.525 18.425,5.525 18.775,5.875 R2.2@18.775,5.9
  other v1: 10,5 32.75,9.75 33.5,9.75 18,10 19,10 28.5,10.25 18.5,10.5 28.5,11.25 28.5,15.5 29.5,15.5 25,15.75 25.75,15.75 15.5,17 16.25,17 15.5,17.75 16.25,17.75 14.75,18.5 15.5,18.5 16.25,18.5
CN_5V_IN: VD1.1 X1.1 | length 3.1
  Top Layer w0.15: VD1.1@8.226,15.405 VD1.1
  Top Layer w0.5: X1.1@6.411,13.589 VD1.1@8.226,15.405
CN_D_N: VD1.2 X1.2 | length 3.9
  Top Layer w0.15: X1.2 6.521,13 6.633,12.888 6.973,12.888 7.723,13.638 8.702,13.638 8.775,13.711 VD1.2 VD1.2@8.287,14.135
CN_D_P: VD1.3 X1.3 | length 4.1
  Top Layer w0.15: X1.3 6.521,12.5 6.633,12.612 7.087,12.612 7.837,13.362 8.702,13.362 8.775,13.289 8.775,13.084 8.994,12.865 VD1.3@9.096,12.865 ; VD1.3@8.287,12.865 VD1.3
GND: C1.2 C2.2 C3.2 C4.2 C5.1 DD1.0 DD1.2 DD2.5 HL1.1 pad.2 R3.1 R7.1 VD1.4 VD1.5 VD2.3 X1.5 X1.TP1 X2.5 | length 2.7
  Top Layer w0.15: DD1.2 20.5,14 DD1.0
  other v1: 2,2 4,2 6,2 8,2 10,2 14,2 18,2 20,2 22,2 24,2 26,2 28,2 30,2 32,2 34,2 5,4 7,4 13,4 17,4 19,4 21,4 23,4 25,4 27,4 29,4 31,4 33,4 35,4 37,4 4,6 8,6 12,6 14,6 30,6 38,6 9,8 11,8 29,8 31,8 6,10 10,10 12,10 14,10 16,10 30,10 38,10 7,12 11,12 35,12 37,12 10,14 12,14 16,14 11,16 19,16 6,18 8,18 10,18 18,18 20,18 22,18 24,18 26,18 28,18 30,18 32,18 34,18 36,18 38,18 3,20 5,20 7,20 9,20 11,20 13,20 15,20 17,20 19,20 21,20 23,20 25,20 27,20 29,20 31,20 33,20 35,20
  other v2: 8,10
NetC2_1: C2.1 DD1.5 | length 3.6
  Top Layer w0.15: v1(17.525,14.125) C2.1@17.525,14.9 ; v1(18.375,12.5) DD1.5
  Bottom Layer w0.15: v1(17.525,14.125) 17.525,13.35 v1(18.375,12.5)
NetC4_1: C4.1 DD1.6 | length 1.2
  Top Layer w0.15: C4.1@18.05,12 DD1.6
NetDD1_9: DD1.9 R2.1 | length 5.3
  Top Layer w0.15: R2.1@20.5,5.875 DD1.9 20.5,10.25
NetDD1_11: DD1.11 R3.2 | length 2.7
  Top Layer w0.15: DD1.11 21.5,9.55 22,9.05 R3.2@22.825,9.05
NetDD1_23: DD1.23 DD2.2 DD2.3 R7.2 | length 17.6
  Top Layer w0.15: DD1.23 22.5,15.7 22.813,16.013 23.287,16.013 25.65,13.65 25.65,12.15 24.475,10.975 24.475,7.708 24.548,7.635 DD2.2 DD2.3 25.915,6.365 25.5,5.95 R7.2@24.425,5.95
NetDD1_24: DD1.24 DD2.1 R6.1 | length 16.5
  Top Layer w0.15: DD1.24 22,16.15 ; 22.037,16.187 22.475,16.625 26.25,16.625 27.225,15.65 27.225,14.775 27.225,13.265 24.8,10.84 24.8,8.978 24.873,8.905 DD2.1
NetDD1_25: DD1.25 DD2.4 | length 16.8
  Top Layer w0.15: v1(21.475,16.4) 21.487,16.388 21.487,15.313 DD1.25 ; v1(25.55,5.075) 25.56,5.085 26.965,5.085 DD2.4
  Bottom Layer w0.15: v1(21.475,16.4) 21.5,16.375 23.65,16.375 25.575,14.45 25.575,5.1 v1(25.55,5.075)
NetHL1_2: HL1.2 R1.1 | length 3.3
  Top Layer w0.15: R1.1@7.725,5 7.725,4.2 8,3.925 9.15,3.925 9.325,3.75 HL1.2@9.325,3
NetHL2_1: HL2.1 R4.2 | length 2.7
  Top Layer w0.15: HL2.1@11.175,3 11.175,3.075 12.425,4.325 12.425,4.65 R4.2@12.775,5
NetHL3_1: HL3.1 R5.1 | length 2
  Top Layer w0.15: HL3.1@14.5,3 R5.1@14.5,5
NetL1_1: L1.1 VD1.8 | length 3
  Top Layer w0.5: L1.1@12.76,17.26 12.76,16.74 13,16.5 14,16.5 14.225,16.275 VD1.8
RS485_N: DD2.7 R8.2 VD2.1 X2.1 | length 15.2
  Top Layer w0.15: X2.1 32.879,12.611 33.119,12.611 33.192,12.537 33.192,12.397 33.192,11.661 36.104,8.75 36.75,8.75 37,8.5 37,7.75 36.588,7.338 35.78,7.338 35.707,7.338 ; DD2.7 32.425,7.211 32.498,7.138 34.427,7.138 34.5,7.211 ; R8.2@34.5,7.775 34.5,7.211 ; VD2.1 36.017,8.15 35.78,7.913 35.78,7.411 35.707,7.338 ; 34.5,7.211 34.573,7.138 35.003,7.138 35.203,7.338 35.707,7.338
RS485_P: DD2.6 R8.1 VD2.2 X2.3 | length 16
  Top Layer w0.15: DD2.6 32.425,6.789 32.498,6.862 34.427,6.862 34.5,6.789 ; R8.1@34.5,6.225 34.5,6.789 ; 34.6,13.43 34.3,13.13 33.541,13.13 33.468,13.057 33.468,12.283 33.468,11.775 36.218,9.025 36.864,9.025 37.275,8.614 37.275,7.636 36.702,7.062 35.707,7.062 ; VD2.2 36.017,6.25 35.78,6.487 35.78,6.989 35.707,7.062 ; 34.5,6.789 34.573,6.862 35.117,6.862 35.317,7.062 35.707,7.062
TX_LED: DD1.19 R4.1 | length 19.8
  Top Layer w0.15: R4.1@11,4.9 v1(11,6.5) ; DD1.19 v1(25.075,13.5)
  Bottom Layer w0.15: v1(11,6.5) 11.925,7.425 19.012,7.425 ; 19.012,7.438 v1(25.075,13.5)
USB_CFG: DD1.18 R5.2 | length 14.3
  Top Layer w0.15: R5.2@16.05,5 16.3,5.25 v1(16.3,6.525) ; DD1.18 24.753,13 25.003,12.751 v1(25.037,12.751)
  Bottom Layer w0.15: v1(16.3,6.525) 18.811,6.525 v1(25.037,12.751)
  other v1: 17.75,6.25
USB_D_N: DD1.4 VD1.7 | length 12.4
  Top Layer w0.125: v1(12.8,14.15) 12.8,14.121 13.246,13.675 13.464,13.675 13.501,13.638 14.152,13.638 14.225,13.711 VD1.7 ; v1(16.725,12.875) 16.798,12.875 17.036,13.112 18.664,13.112 18.777,13 DD1.4
  Bottom Layer w0.125: v1(12.8,14.15) 12.762,14.112 12.762,13.712 12.019,12.97 12.019,12.366 12.586,11.8 14.033,11.8 15.345,13.112 16.414,13.112 16.652,12.875 v1(16.725,12.875)
USB_D_P: DD1.3 VD1.6 | length 10.9
  Top Layer w0.125: v1(12.775,12.925) 12.775,12.929 13.246,13.4 13.35,13.4 13.387,13.362 14.152,13.362 14.225,13.289 VD1.6 ; v1(16.725,13.625) 16.798,13.625 17.036,13.388 18.664,13.388 18.777,13.5 DD1.3
  Bottom Layer w0.125: v1(12.775,12.925) 12.772,12.922 12.368,12.922 12.295,12.848 12.295,12.48 12.7,12.075 13.919,12.075 15.231,13.388 16.414,13.388 16.652,13.625 v1(16.725,13.625)
pads on no net: DD1.1 DD1.10 DD1.12 DD1.13 DD1.14 DD1.15 DD1.16 DD1.17 DD1.20 DD1.21 DD1.22 DD1.26 DD1.27 DD1.28 X1.4 X2.2 X2.4 X2.6

## Polygon pours and split planes (outlines as drawn)
GND on Top Layer "Top Layer-GND" (solid, pour order 36): 0,22 39.5,22 39.5,0 0,0
+5V on Top Layer "Top Layer-+5V 4" (solid, pour order 32): 25.25,14.5 24.5,15.25 24.5,16.25 26.25,16.25 26.5,16 26.5,14.5
+5V on Top Layer "Top Layer-+5V 6" (solid, pour order 28): 32.25,10 32.5,10.25 33.75,10.25 34,10 34,8.75 33.5,8.25 32.25,8.25
+5V on Top Layer "Top Layer-+5V 8" (solid, pour order 20): 18.775,5.9 18.75,5.925 18.75,6.75 17.25,6.75 17.25,5 18.75,5 18.775,5.025
+5V on Top Layer "Top Layer-+5V" (solid, pour order 12): 9,6 10.5,6 10.5,4 9.5,4 9,4.5
+5V on Top Layer "Top Layer-+5V 1" (solid, pour order 10): 14.5,19 14,18.5 14,17 14.5,16.5 16.75,16.5 16.75,18.75 16.5,19
+5V on Top Layer "Top Layer-+5V 2" (solid, pour order 8): 19,11.5 17,9.5 17,8 17.738,7.263 19,8.525 19.975,9.5 20,9.5 20,11 19.5,11.5
+5V on Top Layer "Top Layer-+5V 3" (solid, pour order 34): 26.75,11.25 27.25,11.75 29,11.75 29,9.75 26.75,9.75
+5V on Top Layer "Top Layer-+5V 5" (solid, pour order 30): 28.25,13.75 28,14 28,15.75 28.25,16 29.75,16 30,15.75 30,14 29.75,13.75
+5V on Top Layer "Top Layer-+5V 7" (solid, pour order 26): 33.5,9.5
no net on Top Layer "Top Layer-No Net 1" (solid, pour order 18): 12.75,3.75
no net on Top Layer "Top Layer-No Net" (solid, pour order 6): 17,7.5
GND on Bottom Layer "Bottom Layer-GND" (solid, pour order 38): 0,22 39.5,22 39.5,0 0,0
GND on Signal Layer 2 "Signal Layer 2-GND" (solid, pour order 40): 0,22 39.5,22 39.5,0 0,0
+5V on Signal Layer 1 "Signal Layer 1-+5V" (solid, pour order 42): 0,22 39.5,22 39.5,0 0,0

## Silkscreen, mask and mechanical layers (free items; w line width, h text height)
Top Overlay:
  text "USB/RS485" at 18.55,18.8 h2
  text "PWR" at 8.75,7.75 h1.2 r90
  text "LINK" at 12.25,7.75 h1.2 r90
  text "USB" at 15.25,7.75 h1.2 r90
  text ".designation" at 18.9,0.25 h2
Bottom Overlay:
  text ".pcb_dec_number" at 34.9,0.25 h2
Board:
  the board outline again, w0.1
Assembly Notes (Mech5):
  text "'.title'" at 0,-2.5 h2
  text "'.project'_'.pcb_dec_number'['.Pcb_File_Name_No_Path']" at 0,-6 h2